# Altium PCB shoot2.PcbDoc
Units mm, origin at the board's own origin, x right, y up, seen from the top; angles counter-clockwise.
Board outline 21.59 x 43.94 mm, 2 copper layers (Top Layer, Bottom Layer); 23 components, 48 nets, 77 pads, 19 vias.
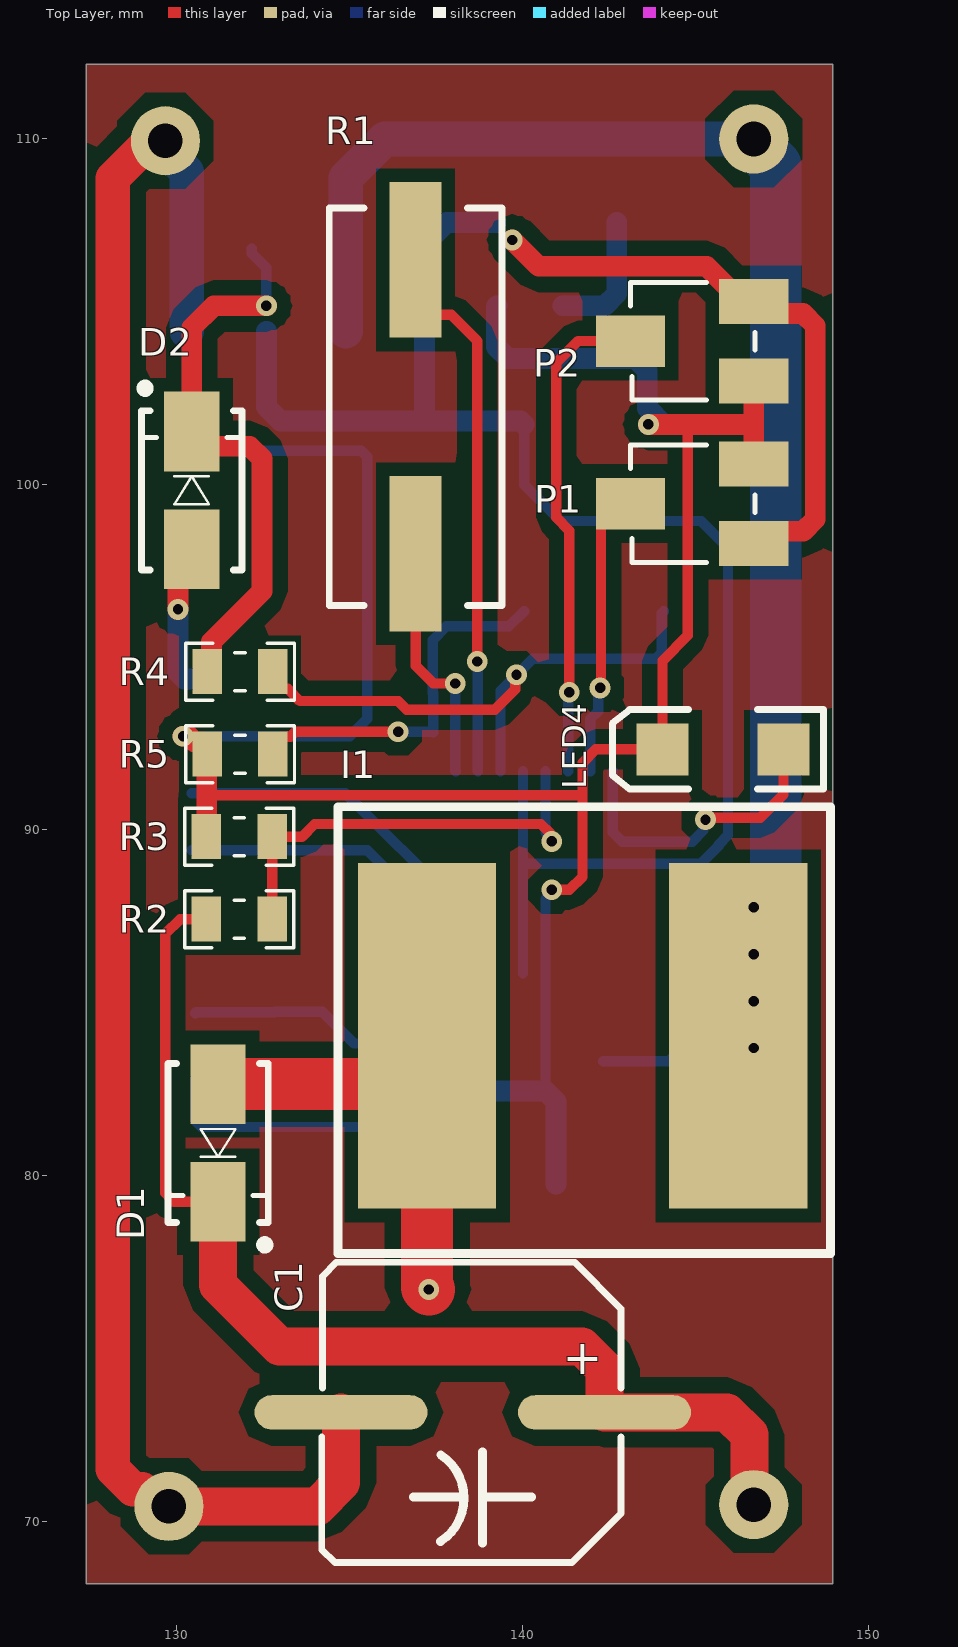
[diagram p0: Top Layer view]
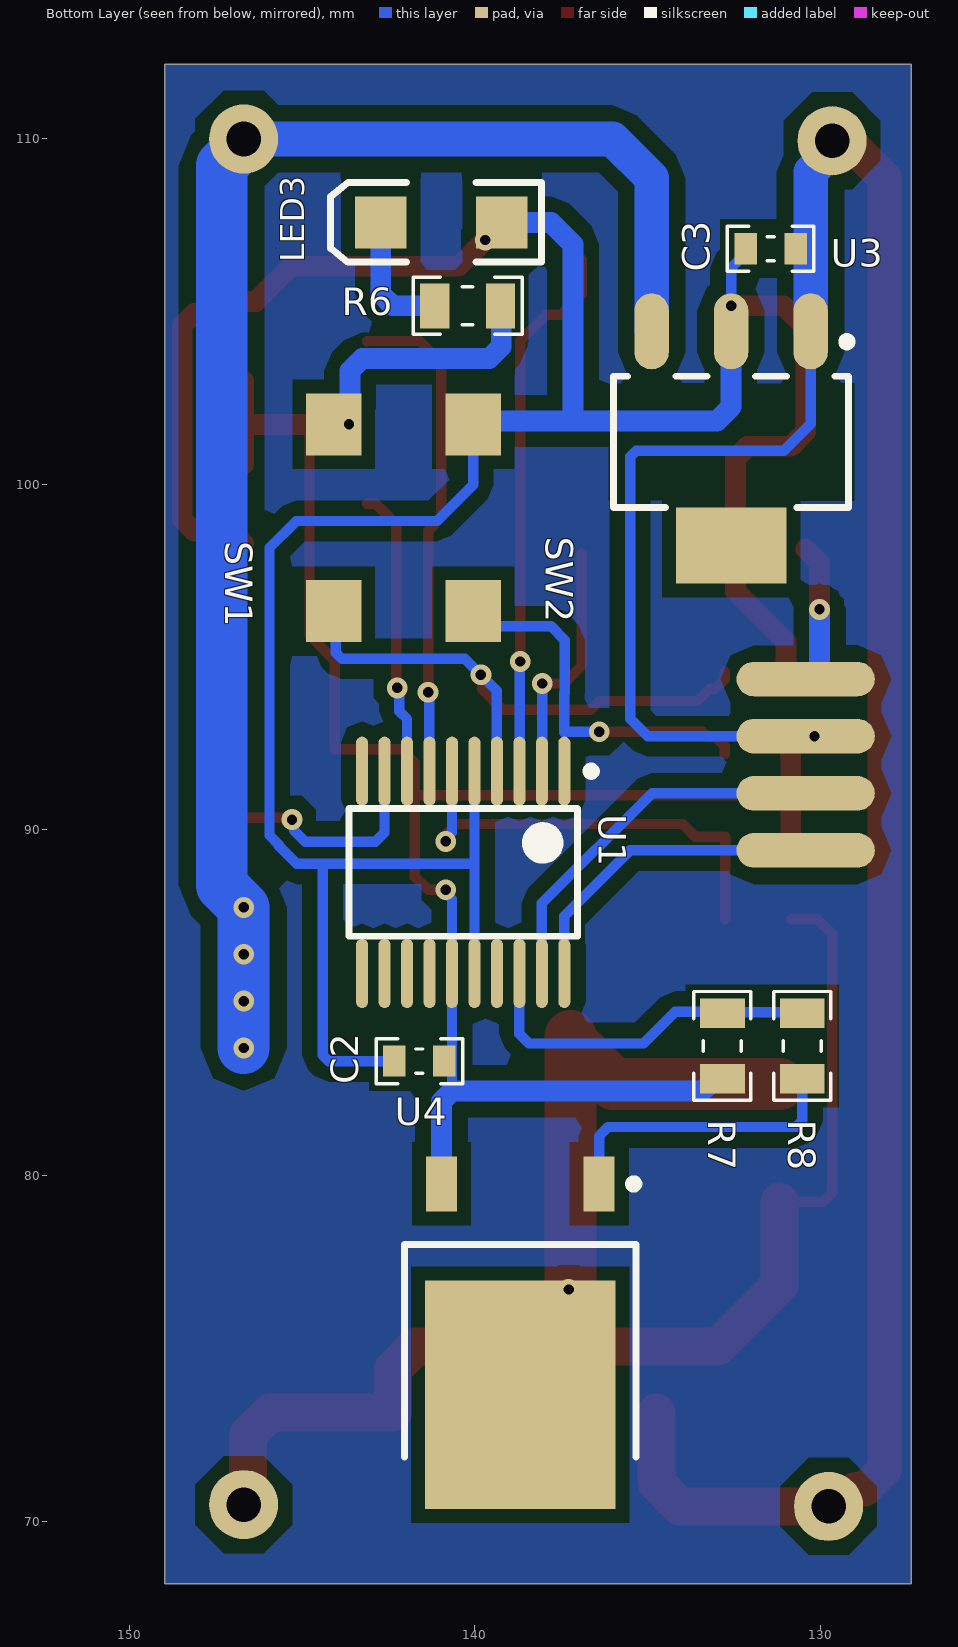
[diagram p1: Bottom Layer view, seen from below]
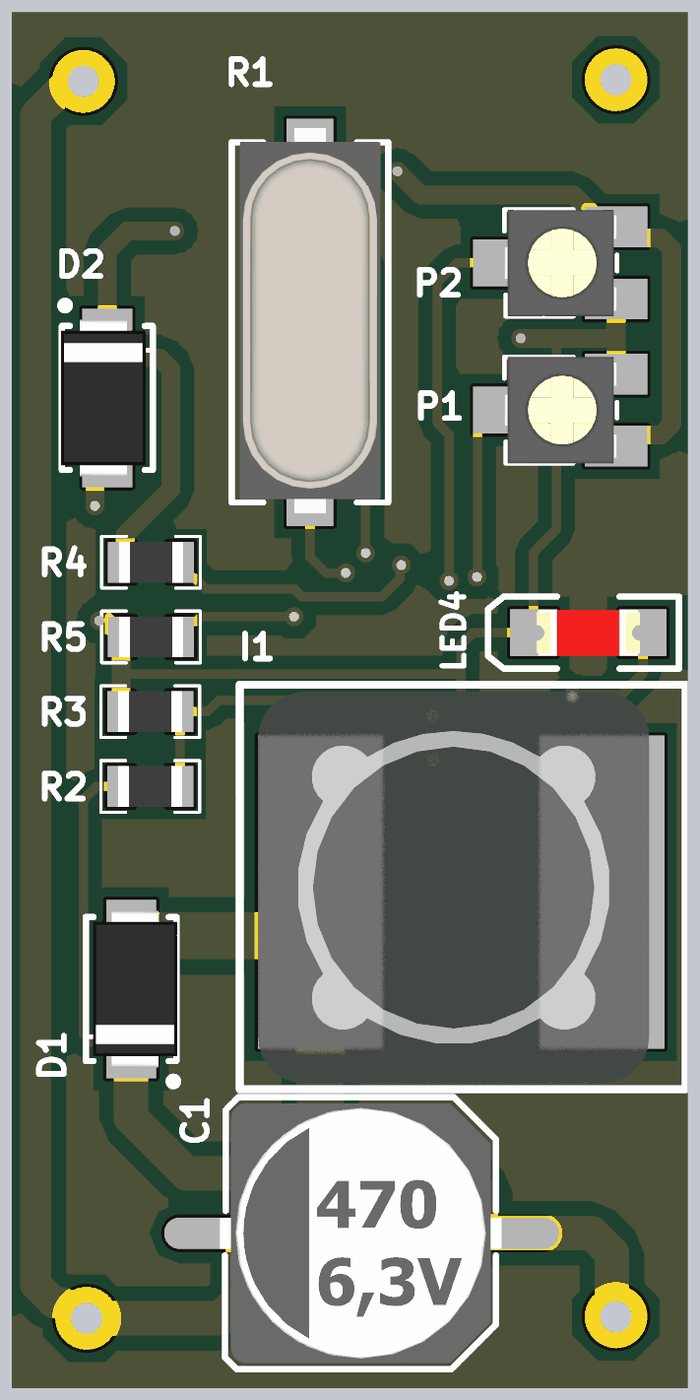
[diagram p2: 3D render of the assembled board from above, using the file's embedded part models]
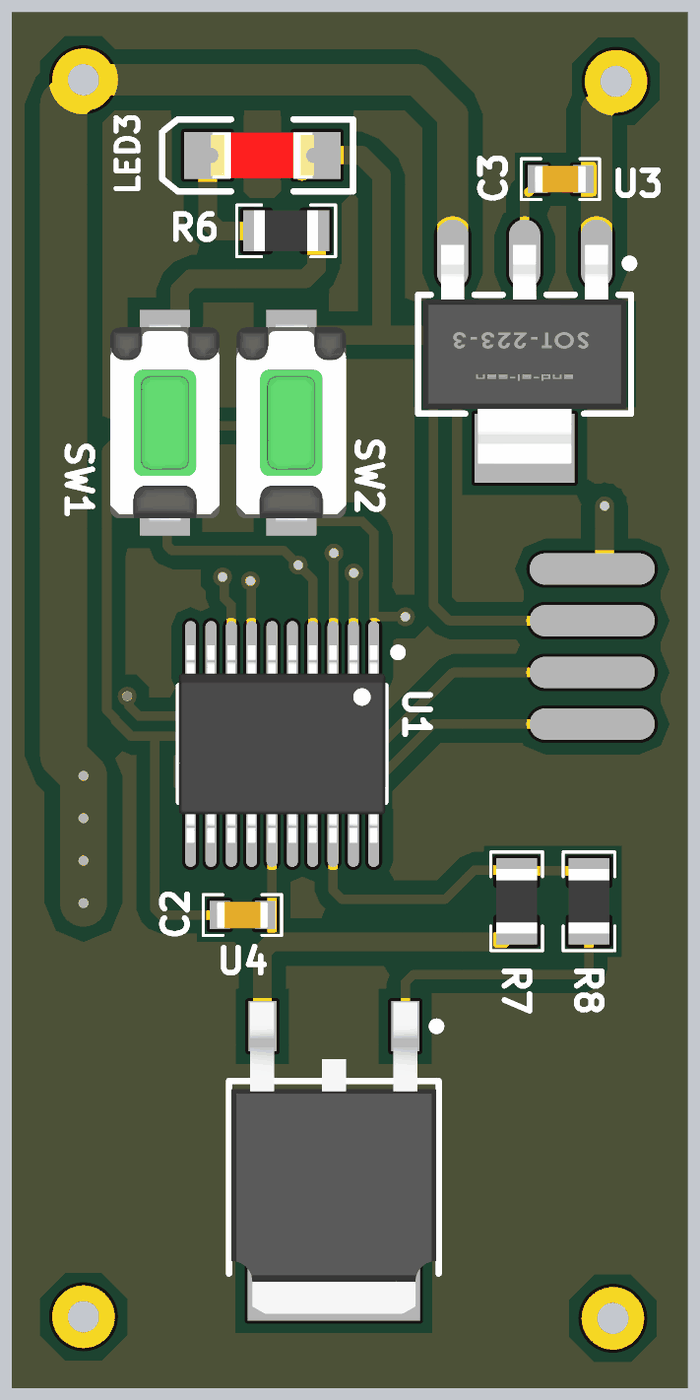
[diagram p3: 3D render of the assembled board from below, using the file's embedded part models]

## Layer stack, top to bottom
Top Solder: solder mask 0.0102, Solder Resist, Dk 3.5
Top Layer: signal copper 0.0356
Dielectric 1: dielectric 0.32, FR-4, Dk 4.8
Bottom Layer: signal copper 0.0356
Bottom Solder: solder mask 0.0102, Solder Resist, Dk 3.5

## Board outline
127.381,68.199 127.381,112.141 148.971,112.141 148.971,68.199

## Design rules (kind name [scope] priority, off if disabled: settings)
Clearance [All] p1: gap=0.2 ignorepadtopadclearanceinfootprint=FALSE except(0.3: Arc-Arc Arc-Track Track-Track; 0.4: Arc-Fill Arc-Poly Arc-Region Track-Fill Track-Poly Track-Region SMDPad-Fill SMDPad-Poly SMDPad-Region THPad-Fill THPad-Poly THPad-Region Via-Fill Via-Poly Via-Region Fill-Fill Fill-Poly Fill-Region Poly-Poly Poly-Region Region-Region)
ComponentClearance [All] p1 off: gap=0.254 collisioncheckmode=3 verticalgap=0.254 showdistances=FALSE
Height [All] p1: minheight=0 maxheight=1000 prefheight=12.7
PolygonConnect [All] p1: connectstyle=Relief reliefconductorwidth=0.254 reliefentries=4 polygonreliefangle="90 Angle" airgapwidth=0.254
RoutingVias [All] p1: holewidth=0.3 width=0.6 viastyle="Through Hole" minholewidth=0.1 minwidth=0.1 maxholewidth=10 maxwidth=10
SolderMaskExpansion [All] p1: expansion=0.102 istentingtop=FALSE
Width [All] p1: maxlimit=10 minlimit=0.1 preferedwidth=0.3
28 further rules are at their usual default settings.

## Components (designator, comment, footprint, x,y, rotation, side; value= is the part's Value field where it differs from the comment)
C1 "Comment" "CAP SMD 470uF" 138.557,73.152 r0 top
C2 "Comment" CAP0603 141.605,83.312 r0 bottom
C3 "Comment" CAP0603 131.445,106.807 r0 bottom
D1 "Comment" DIOM4629X24N 131.191,80.948 r270 top
D2 "Comment" DIOM4629X24N 130.429,99.822 r90 top
I1 "Comment" INDUCTOR_SMD_3A 141.605,84.328 r0 top
LED3 "" "LED 1206" 140.97,107.569 r0 bottom
LED4 "" "LED 1206" 145.796,92.329 r180 top
P1 "Comment" "POT4MM-Small Pot" 144.685,99.434 r180 top
P2 "Comment" "POT4MM-Small Pot" 144.685,104.133 r180 top
R1 "R15" "Crystal SMD" 136.906,102.235 r270 top value="12 MHz" (schematic designator Y1)
R2 "Comment" RES0805 131.803,87.418 r0 top
R3 "Comment" RES0805 131.803,89.805 r0 top
R4 "Comment" RES0805 131.826,94.578 r0 top
R5 "Comment" RES0805 131.826,92.192 r0 top
R6 "Comment" RES0805 140.208,105.156 r180 bottom
R7 "Comment" RES0805 132.842,83.75 r90 bottom
R8 "Comment" RES0805 130.53,83.75 r90 bottom
SW1 "Comment" SMD_ALPS_SKQMBBE010 144.081,99.028 r270 bottom
SW2 "Comment" SMD_ALPS_SKQMBBE010 140.044,99.028 r270 bottom
U1 "Comment" TSOP65P630X120-20N 140.335,88.773 r270 bottom
U3 "Comment" SOT223 132.588,101.219 r270 bottom
U4 "" TO252-3L 138.684,75.46 r270 bottom

## Footprints (in the part's own frame and the unit in brackets; to place one, negate y for a bottom-side part, rotate by r counter-clockwise, add the part's x,y. Pads: shape width x height; smd on the part's side, far side on the other; paste and mask are expansions set on the pad)
CAP0603 [mm] "Chip Capacitor, 2-Leads, Body 1/60x0/80mm, IPC Medium Density DESIGNER:ABBAS BASEREH"
  rect 0.65x0.9 smd: 1(-0.725,0) 2(0.725,0)
  silkscreen extent -1.25,-0.65 1.25,0.65, body extent -0.82,-0.43 0.82,0.43, height 0.4
"CAP SMD 470uF" [mm] "SMD CAP 470uF"
  oval 5x1 smd: 1(3.81,0) 2(-3.81,0)
  silkscreen extent -4.37,-4.34 4.29,4.34, body extent -4.53,-4.15 4.47,4.15, height 12
"Crystal SMD" [mm] "DESIGNER ABBAS BASEREH"
  rect 4.5x1.5 smd: 1(-4.25,0) 2(4.25,0)
  silkscreen extent -5.75,-2.5 5.75,2.5, body extent -6.21,-2.25 6.09,2.25, height 5.18
DIOM4629X24N [mm] "Molded Diode, 2-Leads, Body 4/60x2/90mm, IPC Medium Density-Design:Abbas Basereh"
  rect 2.3x1.6 smd: 1(-1.7,0) 2(1.7,0)
  silkscreen extent -2.3,-1.45 3.07,1.48, body extent -2.5,-1.22 2.5,1.48, height 2.2
INDUCTOR_SMD_3A [mm]
  rect 4x10 smd: 1(4.63,-0.285) 2(-4.37,-0.285)
  silkscreen extent -6.94,-6.58 7.3,6.34, body extent -6.36,-6.39 6.14,6.11, height 7.51
"LED 1206" [mm]
  rect 1.5x1.5 smd: 1(-1.75,0) 2(1.75,0)
  silkscreen extent -2.9,-1.15 3.2,1.15, body extent -1.65,-0.72 1.65,0.73, height 1.36
"POT4MM-Small Pot" [mm] "Square Trimming Potentiometer"
  rect 2x1.3 smd: CCW(-2,-1.15) CW(-2,1.15)
  rect 2x1.5 smd: W(1.568,0)
  silkscreen extent -2.03,-1.7 1.57,1.7, body extent -2.03,-1.7 1.57,1.7, height 2
RES0805 [mm] "Chip Resistor, 2-Leads, Body 2/00x1/25mm, IPC Medium Density DESIGNER:ABBAS BASEREH"
  rect 0.85x1.3 smd: 1(-0.95,0) 2(0.95,0)
  silkscreen extent -1.58,-0.82 1.58,0.82, body extent -1.02,-0.65 1.02,0.65, height 0.5
SMD_ALPS_SKQMBBE010 [mm] "Vertical 6.0X3.5 mm Compact Type (SurfaceMount) SKQM Series ; Height 5.0 mm ; 50,000 Cycles ; 1.57N Force"
  rect 1.8x1.6 smd mask-1.27: 1(-2.7,0) 2(2.7,0)
  body extent -3.15,-1.75 3.15,1.75, height 5.03
SOT223 [mm] "SOT223, 4-Leads, Body 6.5x3.5mm, Pitch 2.30mm-Designer Abbas Basereh"
  oval 2.2x1 smd: 1(-3.2,2.3) 2(-3.2,0) 3(-3.2,-2.3)
  rect 2.2x3.2 smd: 4(3,0)
  Top Layer pour cut-out: -1.7,3.556 1.7,3.556 1.7,-3.556 -1.7,-3.556
  silkscreen extent -3.02,-3.4 1.9,3.47, body extent -3.5,-3.25 3.5,3.25, height 1.7
TO252-3L [mm] "D-PAK, 3-Pads, Body 6.2x6.7mm (max), IPC High Density"
  rect 1.6x0.9 smd: 1(-4.3,2.28) 3(-4.3,-2.28)
  rect 6.6x5.5 smd: 4(1.8,0)
  silkscreen extent -4.42,-3.35 3.6,3.4, body extent -5.06,-3.27 4.88,3.27, height 2.39
TSOP65P630X120-20N [mm] "TSOP, 20-Leads, Body 6.50x4.40mm, Pitch 0.65mm, IPC Medium Density"
  oval 2x0.35 smd: 1(-2.925,2.925) 2(-2.925,2.275) 3(-2.925,1.625) 4(-2.925,0.975) 5(-2.925,0.325) 6(-2.925,-0.325) 7(-2.925,-0.975) 8(-2.925,-1.625) 9(-2.925,-2.275) 10(-2.925,-2.925) 11(2.925,-2.925) 12(2.925,-2.275) 13(2.925,-1.625) 14(2.925,-0.975) 15(2.925,-0.325) 16(2.925,0.325) 17(2.925,0.975) 18(2.925,1.625) 19(2.925,2.275) 20(2.925,2.925)
  silkscreen extent -3.05,-3.3 1.85,3.82, body extent -3.15,-3.3 3.15,3.3, height 1.2

## Part data
R1: library part XTAL, "XTAL Crystal", ComponentLink1Description=Datasheet, ComponentLink2Description=Reference, Design Date=2017-1-3, Designer="ABBAS BASEREH", Mounting Technology="Surface Mount\Through-Hole", Status=Unreleased
U4: "FDD6690A"

## Free pads (board coordinates)
  oval 4x1 smd far side: 4(130.429,89.408) 4(130.429,91.059) 4(130.429,92.71) 4(130.429,94.361)
  round 2 hole 1: 5(129.667,109.931) 6(146.685,109.982) 7(129.769,70.434) 8(146.685,70.485)

## Via types
v1: diameter 0.6, hole 0.3, Top Layer to Bottom Layer, tented both sides, 19 vias

## Nets (pads, with @x,y where several pads share a name; then routed paths per layer and width w, separated by ;. In a path a pad name is that pad's centre, name@x,y a point inside that pad or via, vN(x,y) a via of type N, cw(c..) or ccw(c..) an arc to the next point about the centre after c; other vN are vias at no path point)
12v: I1.1 pad.6 U3.3 | length 43.5
  Bottom Layer w1: U3.3 134.888,108.853 136.017,109.982 pad.6
  Bottom Layer w1.5: v1(146.685,83.693) v1(146.685,85.048) v1(146.685,86.402) v1(146.685,87.757) 147.32,88.392 147.32,109.212 146.685,109.847 pad.6
50V: C1.1 D1.2 pad.8 R2.1 | length 32.9
  Top Layer w0.3: R2.1 130.09,87.418 129.667,86.995 129.667,79.502 129.921,79.248 D1.2
  Top Layer w1.1: D1.2 131.191,76.835 132.969,75.057 141.723,75.057 142.367,74.413 C1.1 145.914,73.152 146.558,72.508 146.558,70.612 pad.8
A: 
ADC0: R2.2 R3.2 U1.6 | length 13.1
  Top Layer w0.3: R2.2 R3.2 133.62,89.805 133.985,90.17 140.529,90.17 140.781,89.918 140.781,89.724 v1(140.838,89.667)
  Bottom Layer w0.3: U1.6 140.66,89.926 140.838,89.748 v1(140.838,89.667)
ADC1: P2.W U1.7 | length 14.4
  Top Layer w0.3: v1(141.351,93.98) 141.351,98.656 140.97,99.037 140.97,103.505 141.605,104.14 143.11,104.14 P2.W
  Bottom Layer w0.3: U1.7 141.32,91.708 141.32,93.949 v1(141.351,93.98)
ADC2: P1.W U1.8 | length 8.4
  Top Layer w0.3: v1(142.24,94.107) 142.267,94.134 142.267,98.834 142.867,99.434 P1.W
  Bottom Layer w0.3: U1.8 141.96,93.207 142.183,93.43 142.183,94.05 v1(142.24,94.107)
ADC4: U1.10
ADC5: 
ADC6: U1.12
BAT+: 
BOOT0: R5.2 SW2.2 U1.1 | length 10.7
  Top Layer w0.3: R5.2 132.776,92.417 133.051,92.692 133.276,92.692 133.421,92.837 v1(136.398,92.837)
  Bottom Layer w0.3: v1(136.398,92.837) 137.399,92.837 137.41,92.826 137.41,93.954 137.399,93.965 137.399,95.489 137.795,95.885 139.601,95.885 SW2.2
C1: 
C2: 
E1: 
E2: 
E`: 
G1: 
G2: 
GATE2: R8.1 U4.1 | length 8.7
  Bottom Layer w0.3: R8.1 130.53,81.583 130.706,81.407 136.144,81.407 136.27,81.281 136.404,81.147 U4.1
GND: C1.2 C2.1 C3.1 LED4.2 P1.CCW P2.CW pad.4@130.429,92.71 pad.5 pad.7 R3.1 R5.1 R6.2 R7.1 SW1.1 U1.15 U3.1 U4.3 | length 136.6
  Top Layer w0.3: 130.865,90.998 141.666,90.998 141.732,90.932 ; v1(140.843,88.265) 141.351,88.265 141.732,88.646 141.732,90.932 ; 144.78,101.727 144.78,95.631 144.046,94.897 LED4.2 142.113,92.329 141.732,91.948 141.732,90.932
  Top Layer w0.6: v1(130.175,92.71) 130.358,92.71 130.526,92.542 130.751,92.542 130.876,92.417 R5.1 130.865,92.18 130.865,90.998 130.865,89.816 R3.1 ; v1(143.637,101.727) 144.78,101.727 146.629,101.727 146.685,101.783 ; P1.CCW 146.685,101.783 ; P2.CW 146.685,101.783
  Top Layer w1: pad.5 129.476,109.74 129.037,109.74 128.143,108.845 128.143,71.516 128.729,70.93 129.002,70.93 129.498,70.434 pad.7
  Top Layer w1.1: pad.7 134.061,70.434 134.747,71.12 C1.2
  Bottom Layer w0.3: U3.1 130.288,101.741 131.064,100.965 135.333,100.965 135.509,100.789 135.509,93.218 135.001,92.71 pad.4@130.429,92.71 ; 140.66,82.449 U1.15 140.66,88.001 140.843,88.184 v1(140.843,88.265)
  Bottom Layer w0.6: R7.1 133.067,82.8 133.418,82.449 140.66,82.449 140.964,82.145 U4.3 ; R6.2 139.233,105.131 139.233,103.983 139.585,103.632 143.255,103.632 143.607,103.281 143.607,102.202 SW1.1 ; v1(143.637,101.727) SW1.1@144.08,101.727
  Bottom Layer w1: pad.5 129.667,109.661 130.288,109.04 U3.1
K: 
LED1: U1.13
LED2: U1.11
LED3: LED3.2 R6.1 | length 3.8
  Bottom Layer w0.6: R6.1 142.369,105.156 142.72,105.507 LED3.2
LED4: LED4.1 U1.9 | length 8.8
  Top Layer w0.3: v1(145.288,90.297) 145.345,90.354 146.869,90.354 147.546,91.031 LED4.1
  Bottom Layer w0.3: U1.9 142.61,89.927 142.875,89.662 144.907,89.662 145.231,89.986 145.231,90.24 v1(145.288,90.297)
NET1: D1.1 I1.2 U4.4 | length 13.9
  Top Layer w1.5: D1.1 135.985,82.648 I1.2@137.235,83.898 ; I1.2 I1.2@137.235,83.898 ; v1(137.287,76.708) 137.235,76.76 I1.2@137.235,83.898
NET2: 
NET3: 
NRST: R4.2 SW1.2 U1.4 | length 16.9
  Top Layer w0.3: R4.2 132.776,94.353 133.051,94.078 133.207,94.078 133.559,93.726 136.398,93.726 136.652,93.472 139.192,93.472 139.783,94.063 139.783,94.444 v1(139.823,94.484)
  Bottom Layer w0.3: U1.4 139.36,94.021 v1(139.823,94.484) 140.286,94.947 143.842,94.947 144.018,95.123 144.018,96.265 SW1.2
OSC_IN: R1.2 U1.2 | length 7.1
  Top Layer w0.3: R1.2 136.906,94.742 137.414,94.234 v1(138.049,94.234)
  Bottom Layer w0.3: v1(138.049,94.234) 138.055,94.228 138.055,91.703 U1.2
OSC_OUT: R1.1 U1.3 | length 15.8
  Top Layer w0.3: R1.1 136.906,105.494 137.506,104.894 137.93,104.894 138.684,104.14 v1(138.684,94.869)
  Bottom Layer w0.3: v1(138.684,94.869) 138.7,94.853 138.7,91.708 U1.3
PWM: 
PWM2: 
PWM_B: 
PWM_G: U1.14
PWM_R: U1.17
SHOOT: 
SHOOTOUT: 
SPIN: 
SPINOUT: 
SWCLK: pad.4@130.429,89.408 U1.20 | length 9.4
  Bottom Layer w0.3: pad.4@130.429,89.408 135.509,89.408 137.41,87.507 U1.20
SWDIO: pad.4@130.429,91.059 U1.19 | length 11
  Bottom Layer w0.3: pad.4@130.429,91.059 134.874,91.059 138.06,87.873 U1.19
TIM1_CH3: R7.2 R8.2 U1.18 | length 10.4
  Bottom Layer w0.3: R8.2 130.552,84.722 132.82,84.722 132.842,84.744 134.204,84.744 135.128,83.82 138.43,83.82 138.71,84.1 U1.18
VCC: C2.2 C3.2 D2.2 LED3.1 P1.CW P2.CCW R4.1 SW2.1 U1.5 U1.16 U3.2 | length 87.7
  Top Layer w0.6: R4.1 131.001,94.703 131.001,95.441 132.461,96.901 132.461,100.741 132.11,101.092 130.859,101.092 D2.2 130.429,104.521 131.064,105.156 v1(132.588,105.156) ; v1(139.7,107.061) 140.462,106.299 145.319,106.299 146.335,105.283 P2.CCW 147.035,104.933 148.112,104.933 148.463,104.582 148.463,98.985 148.112,98.634 147.035,98.634 P1.CW
  Bottom Layer w0.3: C3.2 132.17,106.682 132.588,106.264 v1(132.588,105.156) ; U1.16 140.01,89.017 ; U1.5 140.01,89.017 ; SW2.1 140.044,99.986 140.971,99.059 141.097,98.933 145.161,98.933 145.938,98.156 145.938,89.844 145.669,89.575 145.669,89.535 145.151,89.017 144.399,89.017 ; C2.2 144.223,83.312 144.399,83.488 144.399,89.017 ; 140.01,89.017 144.399,89.017
  Bottom Layer w0.6: U3.2 132.588,102.235 132.999,101.824 137.16,101.824 ; LED3.1 137.795,107.569 137.16,106.934 137.16,101.824 ; SW2.1 139.947,101.824 137.16,101.824
VIB2: 
Vin: D2.1 pad.4@130.429,94.361 | length 4.2
  Top Layer w0.6: v1(130.032,96.377) 130.032,97.725 D2.1
  Bottom Layer w0.6: v1(130.032,96.377) 130.032,94.546 130.217,94.361 pad.4@130.429,94.361
VO: 
WD_2: 
pads on no net: U3.4

## Polygon pours and split planes (outlines as drawn)
no net on Top Layer "NONET_L01_P000" (solid, pour order 0): 127.381,68.199 127.381,112.141 148.971,112.141 148.971,68.199
no net on Bottom Layer "NONET_L02_P001" (solid, pour order 1): 127.381,68.199 127.381,112.141 148.971,112.141 148.971,68.199

## Silkscreen, mask and mechanical layers (free items; w line width, h text height)
Mechanical 1:
  the board outline again, w0.3

## Text inside footprints (layer, text, board x,y; h text height)
C1: Top Overlay "+" at 141.157,74.252 h1